# Altium PCB GTU-V1.0-20160325 .PcbDoc (part 3 of 5)
Units mil, origin at the board's own origin, x right, y up, seen from the top; angles counter-clockwise.
Board outline 6299.21 x 4330.71 mil, 4 copper layers (Top Layer, POWER, GND, Bottom Layer); 208 components, 165 nets, 695 pads, 348 vias.
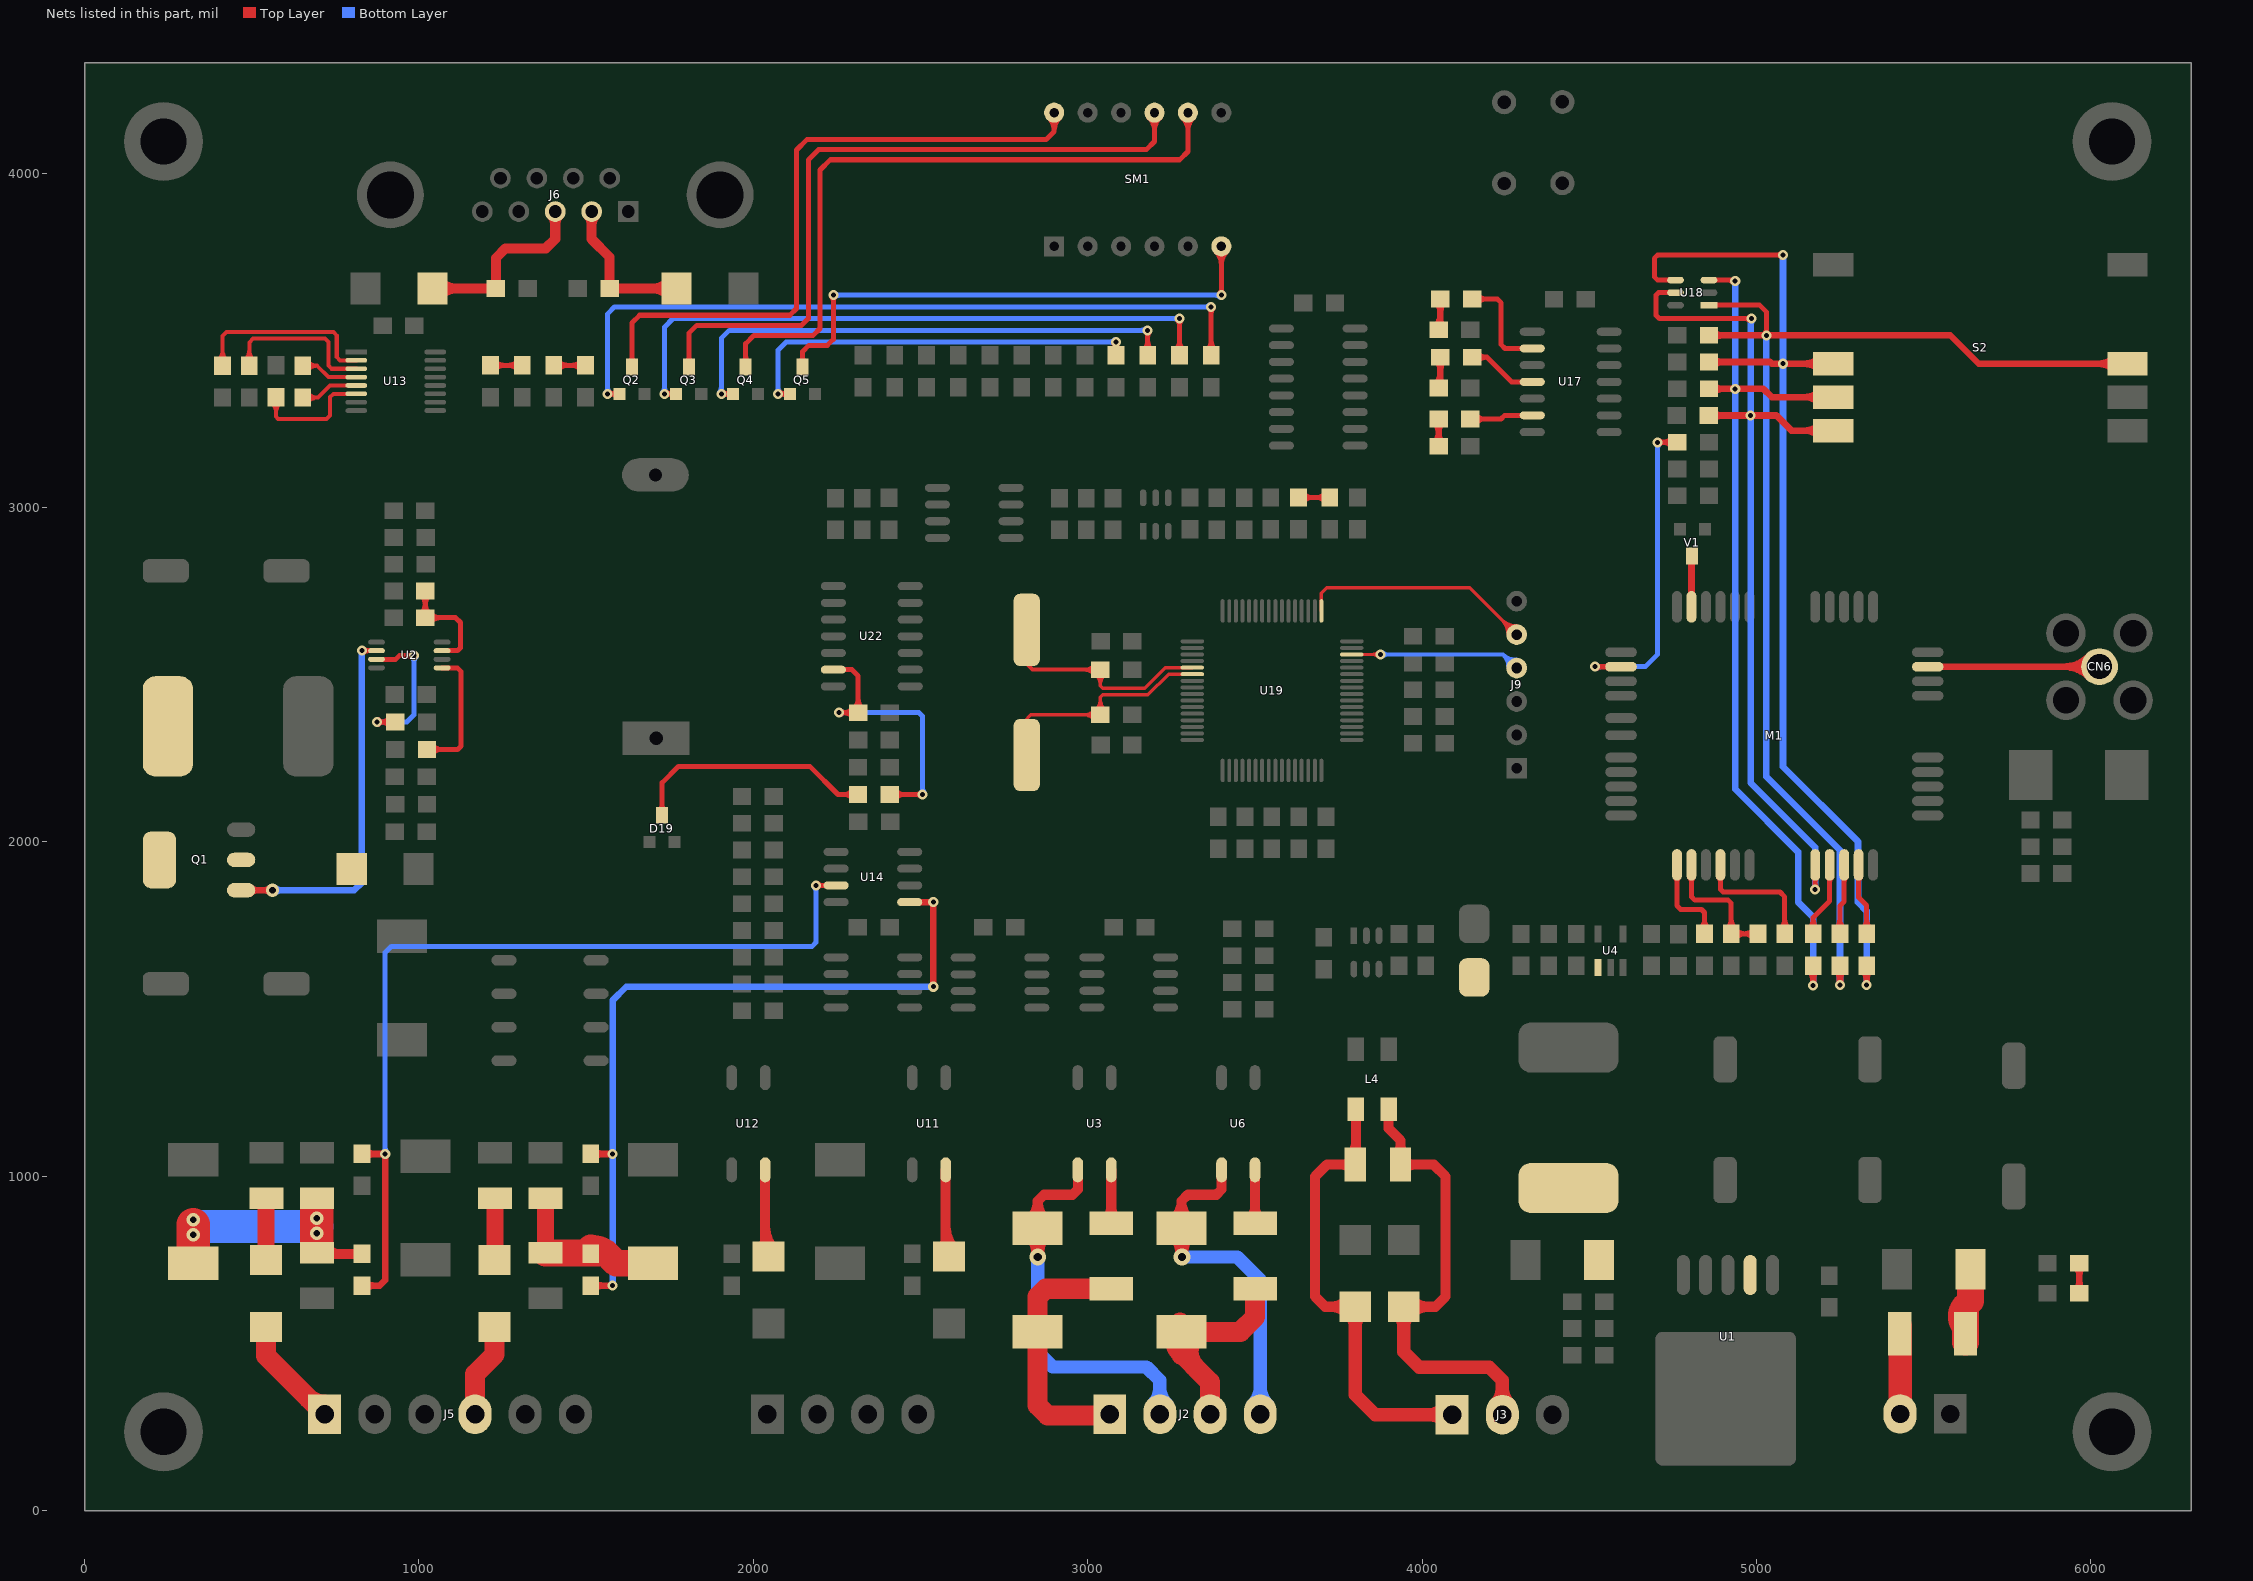
[diagram p5: the nets of this part, all layers, seen from the top]

## Via types
v1: diameter 30, hole 15, Top Layer to Bottom Layer, 262 vias
v2: diameter 40, hole 20, Top Layer to Bottom Layer, 36 vias
v3: diameter 40, hole 40, Top Layer to Bottom Layer, 16 vias
v4: diameter 80, hole 40, Top Layer to Bottom Layer, 12 vias
v5: diameter 60, hole 30, Top Layer to Bottom Layer, 11 vias
v6: diameter 50, hole 25, Top Layer to Bottom Layer, 10 vias
v7: diameter 70, hole 35, Top Layer to Bottom Layer, 1 vias

## Nets (pads, with @x,y where several pads share a name; then routed paths per layer and width w, separated by ;. In a path a pad name is that pad's centre, name@x,y a point inside that pad or via, vN(x,y) a via of type N, cw(c..) or ccw(c..) an arc to the next point about the centre after c; other vN are vias at no path point) (continued)
NetC21_2: C21.2 U13.3 | length 616.7
  Top Layer w12: C21.2@492.71,3424 492.71,3493.5 504.21,3505 719.21,3505 729.21,3495 729.21,3425 739.21,3415 U13.3@812.71,3415 ; 492.71,3472.37 cw(c446.84,3472.37) 479.28,3439.94 ccw(c446.84,3472.37) 492.71,3472.37 ; 492.71,3472.37 ccw(c538.58,3472.37) 506.15,3439.94 cw(c538.58,3472.37) 492.71,3472.37
NetC22_2: C22.2 U13.2 | length 711.7
  Top Layer w12: C22.2@412.71,3424 412.71,3513.5 424.21,3525 744.21,3525 754.21,3515 754.21,3450 764.21,3440 U13.2@812.71,3440 ; 412.71,3472.37 cw(c366.84,3472.37) 399.28,3439.94 ccw(c366.84,3472.37) 412.71,3472.37 ; 412.71,3472.37 ccw(c458.58,3472.37) 426.15,3439.94 cw(c458.58,3472.37) 412.71,3472.37
NetC23_2: C23.2 U13.6 | length 508.6
  Top Layer w12: C23.2@572.71,3330 572.71,3271.5 579.21,3265 724.21,3265 734.21,3275 734.21,3330 744.21,3340 U13.6@812.71,3340 ; 572.71,3281.63 cw(c618.58,3281.63) 586.15,3314.06 ccw(c618.58,3281.63) 572.71,3281.63 ; 572.71,3281.63 ccw(c526.84,3281.63) 559.28,3314.06 cw(c526.84,3281.63) 572.71,3281.63
NetC24_1: C24.1 U13.5 | length 317.2
  Top Layer w12: C24.1@652.71,3329 698.21,3329 ; U13.5@812.71,3365 734.21,3365 698.21,3329 ; 698.21,3329 cw(c698.21,3373.98) 666.23,3342.36 ccw(c698.21,3373.98) 698.21,3329 ; 698.21,3329 ccw(c698.21,3284.02) 666.23,3315.64 cw(c698.21,3284.02) 698.21,3329
NetC24_2: C24.2 U13.4 | length 302
  Top Layer w12: C24.2@652.71,3424 695.21,3424 ; U13.4@812.71,3390 729.21,3390 695.21,3424 ; 695.21,3424 cw(c695.21,3462.03) 666.87,3436.67 ccw(c695.21,3462.03) 695.21,3424 ; 695.21,3424 ccw(c695.21,3385.97) 666.87,3411.33 cw(c695.21,3385.97) 695.21,3424
NetC25_1: C25.1 R29.1 U14.3 | length 3054.6
  Top Layer w15: v1(2187,1870) U14.3@2247.6,1870 ; 2205.11,1870 cw(c2205.11,1888.11) 2192.3,1875.3 ccw(c2205.11,1888.11) 2205.11,1870 ; 2205.11,1870 ccw(c2205.11,1851.89) 2192.3,1864.7 cw(c2205.11,1851.89) 2205.11,1870
  Top Layer w20: R29.1@830,673 882.21,673 899.21,690 v1(899.21,1067) C25.1@830,1067 ; 866.21,673 cw(c866.21,709.21) 840.61,683.61 ccw(c866.21,709.21) 866.21,673 ; 866.21,673 ccw(c866.21,636.79) 840.61,662.39 cw(c866.21,636.79) 866.21,673 ; 866.21,1067 cw(c866.21,1103.21) 840.61,1077.61 ccw(c866.21,1103.21) 866.21,1067 ; 866.21,1067 ccw(c866.21,1030.79) 840.61,1056.39 cw(c866.21,1030.79) 866.21,1067
  Bottom Layer w15: v1(899.21,1067) 899.21,1669.21 918,1688 2176,1688 2187,1699 v1(2187,1870) ; 899.21,1085.11 cw(c881.11,1085.11) 893.91,1072.3 ccw(c881.11,1085.11) 899.21,1085.11 ; 899.21,1085.11 ccw(c917.32,1085.11) 904.52,1072.3 cw(c917.32,1085.11) 899.21,1085.11 ; 2187,1851.89 cw(c2205.11,1851.89) 2192.3,1864.7 ccw(c2205.11,1851.89) 2187,1851.89 ; 2187,1851.89 ccw(c2168.89,1851.89) 2181.7,1864.7 cw(c2168.89,1851.89) 2187,1851.89
NetC27_1: C27.1 R38.1 U14.5 | length 2510.3
  Top Layer w20: R38.1@1513.6,673 v1(1578.21,673) ; C27.1@1513.6,1067 v1(1578.21,1067) ; U14.5@2467.6,1820 v1(2538,1820) v1(2538,1567) ; 1549.81,673 cw(c1549.81,709.21) 1524.21,683.61 ccw(c1549.81,709.21) 1549.81,673 ; 1549.81,673 ccw(c1549.81,636.79) 1524.21,662.39 cw(c1549.81,636.79) 1549.81,673 ; 1549.81,1067 cw(c1549.81,1103.21) 1524.21,1077.61 ccw(c1549.81,1103.21) 1549.81,1067 ; 1549.81,1067 ccw(c1549.81,1030.79) 1524.21,1056.39 cw(c1549.81,1030.79) 1549.81,1067
  Bottom Layer w20: v1@1579.21,671.79 1579.21,1526.21 1620,1567 v1(2538,1567)
NetC34_2: C34.2 M1.27 S2.1 U18.5 | length 3167.9
  Top Layer w15: U18.5@4757.6,3642.5 4706.71,3642.5 4699.21,3635 4699.21,3575 4709.21,3565 v1(4984.21,3565) ; v1(5175.37,1857.16) M1.27@5175.37,1931.35 ; 4966.11,3565 cw(c4966.11,3546.89) 4978.91,3559.7 ccw(c4966.11,3546.89) 4966.11,3565 ; 4966.11,3565 ccw(c4966.11,3583.11) 4978.91,3570.3 cw(c4966.11,3583.11) 4966.11,3565 ; 5175.37,1875.26 cw(c5157.26,1875.26) 5170.07,1862.46 ccw(c5157.26,1875.26) 5175.37,1875.26 ; 5175.37,1875.26 ccw(c5193.48,1875.26) 5180.67,1862.46 cw(c5193.48,1875.26) 5175.37,1875.26 ; 5175.37,1881.33 cw(c5192.91,1881.33) 5180.51,1893.73 ccw(c5192.91,1881.33) 5175.37,1881.33 ; 5175.37,1881.33 ccw(c5157.83,1881.33) 5170.23,1893.73 cw(c5157.83,1881.33) 5175.37,1881.33
  Top Layer w20: C34.2@4856.6,3275 5059.21,3275 5104.21,3230 S2.1@5229.29,3230 ; 4895.31,3275 cw(c4895.31,3311.21) 4869.71,3285.61 ccw(c4895.31,3311.21) 4895.31,3275 ; 4895.31,3275 ccw(c4895.31,3238.79) 4869.71,3264.39 cw(c4895.31,3238.79) 4895.31,3275 ; 5143.94,3230 cw(c5143.94,3169.64) 5186.61,3212.32 ccw(c5143.94,3169.64) 5143.94,3230 ; 5143.94,3230 ccw(c5143.94,3290.36) 5186.61,3247.68 cw(c5143.94,3290.36) 5143.94,3230
  Bottom Layer w20: v1@4982.21,3567 4982.21,2177 5175.37,1983.84 v1(5175.37,1857.16) ; 4982.21,3548.1 cw(c5001.11,3548.1) 4987.75,3561.46 ccw(c5001.11,3548.1) 4982.21,3548.1
  other v1: 4982.21,3275
NetC35_1: C35.1 R42.2 S2.3 U18.4 | length 3711.1
  Top Layer w15: U18.4@4757.6,3680 4704.21,3680 4694.21,3690 4694.21,3745 4704.21,3755 v1(5079.21,3755) ; 5061.11,3755 cw(c5061.11,3736.89) 5073.91,3749.7 ccw(c5061.11,3736.89) 5061.11,3755 ; 5061.11,3755 ccw(c5061.11,3773.11) 5073.91,3760.3 cw(c5061.11,3773.11) 5061.11,3755
  Top Layer w20: C35.1@4857.6,3435 5040.21,3435 5045.21,3430 S2.3@5229.29,3430 S2.3@5224.29,3435 ; v1(5329.21,1572) R42.2@5329.21,1630 ; 4896.31,3435 cw(c4896.31,3471.21) 4870.71,3445.61 ccw(c4896.31,3471.21) 4896.31,3435 ; 4896.31,3435 ccw(c4896.31,3398.79) 4870.71,3424.39 cw(c4896.31,3398.79) 4896.31,3435 ; 5143.94,3430 cw(c5143.94,3369.64) 5186.61,3412.32 ccw(c5143.94,3369.64) 5143.94,3430 ; 5143.94,3430 ccw(c5143.94,3490.36) 5186.61,3447.68 cw(c5143.94,3490.36) 5143.94,3430 ; 5329.21,1591.29 cw(c5365.43,1591.29) 5339.82,1616.89 ccw(c5365.43,1591.29) 5329.21,1591.29 ; 5329.21,1591.29 ccw(c5293,1591.29) 5318.61,1616.89 cw(c5293,1591.29) 5329.21,1591.29
  Bottom Layer w20: v1(5079.21,3755) 5079.21,2225 5303.21,2001 5303.21,1820 5329.21,1794 v1(5329.21,1572)
  other v1: 5079.21,3430
NetC36_1: C36.1 R45.2 S2.6 U18.1 | length 4102.9
  Top Layer w15: U18.1@4857.6,3605 5009.21,3605 5029.21,3585 v1(5029.21,3515) ; 5029.21,3533.11 cw(c5011.11,3533.11) 5023.91,3520.3 ccw(c5011.11,3533.11) 5029.21,3533.11 ; 5029.21,3533.11 ccw(c5047.32,3533.11) 5034.52,3520.3 cw(c5047.32,3533.11) 5029.21,3533.11
  Top Layer w20: C36.1@4857.6,3515 5579.21,3515 5664.21,3430 S2.6@6109.21,3430 ; v1(5249.21,1572) R45.2@5249.21,1630 ; 4896.31,3515 cw(c4896.31,3551.21) 4870.71,3525.61 ccw(c4896.31,3551.21) 4896.31,3515 ; 4896.31,3515 ccw(c4896.31,3478.79) 4870.71,3504.39 cw(c4896.31,3478.79) 4896.31,3515 ; 5249.21,1591.29 cw(c5285.43,1591.29) 5259.82,1616.89 ccw(c5285.43,1591.29) 5249.21,1591.29 ; 5249.21,1591.29 ccw(c5213,1591.29) 5238.61,1616.89 cw(c5213,1591.29) 5249.21,1591.29 ; 6023.86,3430 cw(c6023.86,3369.64) 6066.53,3412.32 ccw(c6023.86,3369.64) 6023.86,3430 ; 6023.86,3430 ccw(c6023.86,3490.36) 6066.53,3447.68 cw(c6023.86,3490.36) 6023.86,3430
  Bottom Layer w20: v1(5029.21,3515) 5029.21,2195 5249.21,1975 v1(5249.21,1572)
NetC37_1: C37.1 R48.2 S2.2 U18.3 | length 3179.5
  Top Layer w15: U18.3@4857.6,3680 v1@4936.21,3680 ; 4913.28,3680 cw(c4913.28,3655.07) 4930.91,3672.7 ccw(c4913.28,3655.07) 4913.28,3680
  Top Layer w20: C37.1@4857.6,3355 5020.21,3355 5045.21,3330 S2.2@5229.29,3330 ; v1(5169.21,1571) R48.2@5169.21,1630 ; 4896.31,3355 cw(c4896.31,3391.21) 4870.71,3365.61 ccw(c4896.31,3391.21) 4896.31,3355 ; 4896.31,3355 ccw(c4896.31,3318.79) 4870.71,3344.39 cw(c4896.31,3318.79) 4896.31,3355 ; 5143.94,3330 cw(c5143.94,3269.64) 5186.61,3312.32 ccw(c5143.94,3269.64) 5143.94,3330 ; 5143.94,3330 ccw(c5143.94,3390.36) 5186.61,3347.68 cw(c5143.94,3390.36) 5143.94,3330 ; 5169.21,1591.29 cw(c5205.43,1591.29) 5179.82,1616.89 ccw(c5205.43,1591.29) 5169.21,1591.29 ; 5169.21,1591.29 ccw(c5133,1591.29) 5158.61,1616.89 cw(c5133,1591.29) 5169.21,1591.29
  Bottom Layer w20: v1(4936.21,3678) 4936.21,2158 5124.21,1970 5124.21,1820 5169.21,1775 v1(5169.21,1571)
  other v1: 4936.21,3355
NetC47_1: C47.1 U19.5 Y1.2 | length 943.4
  Top Layer w10: C47.1@3037.6,2520 3037.6,2467.4 ; U19.5@3312.6,2521.26 3231.26,2521.26 3170,2460 3045,2460 3037.6,2467.4 ; 3037.6,2467.4 cw(c3084.23,2467.4) 3051.6,2500.71 ccw(c3084.23,2467.4) 3037.6,2467.4 ; 3037.6,2467.4 ccw(c2990.97,2467.4) 3023.6,2500.71 cw(c2990.97,2467.4) 3037.6,2467.4
  Top Layer w12: Y1.2@2817.6,2540 2817.6,2570 2820,2567.6 2820,2530 2835,2515 C47.1@3037.6,2515 ; 2989.23,2515 cw(c2989.23,2469.13) 3021.66,2501.56 ccw(c2989.23,2469.13) 2989.23,2515 ; 2989.23,2515 ccw(c2989.23,2560.87) 3021.66,2528.44 cw(c2989.23,2560.87) 2989.23,2515
NetC48_1: C48.1 U19.6 Y1.1 | length 1032.7
  Top Layer w10: Y1.1@2817.6,2330 2810,2337.6 Y1.1@2810,2360 ; Y1.1@2820,2340 2810,2350 Y1.1@2810,2360 ; C48.1@3037.6,2370 3037.6,2432.6 3045,2440 3180,2440 3241.57,2501.57 U19.6@3312.6,2501.57 ; C48.1@3037.6,2380 2830,2380 Y1.1@2810,2360 ; 2986.81,2380 cw(c2986.81,2331.72) 3020.96,2365.86 ccw(c2986.81,2331.72) 2986.81,2380 ; 2986.81,2380 ccw(c2986.81,2428.28) 3020.96,2394.14 cw(c2986.81,2428.28) 2986.81,2380 ; 3037.6,2428.28 cw(c2989.31,2428.28) 3023.46,2394.14 ccw(c2989.31,2428.28) 3037.6,2428.28 ; 3037.6,2428.28 ccw(c3085.88,2428.28) 3051.74,2394.14 cw(c3085.88,2428.28) 3037.6,2428.28
  Top Layer w30: Y1.1@2817.6,2260 Y1.1@2817.6,2330
NetC49_1: C49.1 R77.1 U22.6 | length 1461.6
  Top Layer w15: U22.6@2239.21,2515 2295,2515 2313.21,2496.79 C49.1@2313.21,2386.67 v1@2256,2386.67 ; R77.1@2408,2142 2506,2142 v1(2506.33,2141.67) ; v1@2268.46,2386.67 cw(c2268.46,2344.42) 2298.34,2374.29 ccw(c2268.46,2344.42) v1@2268.46,2386.67 ; v1@2268.46,2386.67 ccw(c2268.46,2428.92) 2298.34,2399.04 cw(c2268.46,2428.92) v1@2268.46,2386.67 ; 2313.21,2428.92 cw(c2270.96,2428.92) 2300.84,2399.04 ccw(c2270.96,2428.92) 2313.21,2428.92 ; 2313.21,2428.92 ccw(c2355.46,2428.92) 2325.59,2399.04 cw(c2355.46,2428.92) 2313.21,2428.92 ; 2452.75,2142 cw(c2452.75,2184.25) 2422.87,2154.37 ccw(c2452.75,2184.25) 2452.75,2142 ; 2452.75,2142 ccw(c2452.75,2099.75) 2422.87,2129.63 cw(c2452.75,2099.75) 2452.75,2142 ; v1@2261.3,2381.7 cw(c2273.3,2369.7) 2273.3,2386.67 ccw(c2273.3,2369.7) v1@2261.3,2381.7 ; v1@2261.3,2392.3 ccw(c2274.91,2405.91) 2274.91,2386.67 cw(c2274.91,2405.91) v1@2261.3,2392.3 ; 2487.42,2142 cw(c2487.42,2122.76) 2501.03,2136.36 ccw(c2487.42,2122.76) 2487.42,2142 ; 2489.03,2142 ccw(c2489.03,2158.97) 2501.03,2146.97 cw(c2489.03,2158.97) 2489.03,2142
  Bottom Layer w15: v1(2256,2387) 2495,2387 2506,2376 v1@2506,2142 ; 2274.11,2387 cw(c2274.11,2405.11) 2261.3,2392.3 ccw(c2274.11,2405.11) 2274.11,2387 ; 2274.11,2387 ccw(c2274.11,2368.89) 2261.3,2381.7 cw(c2274.11,2368.89) 2274.11,2387 ; v1@2501.03,2146.97 ccw(c2489.03,2158.97) 2506,2158.97 cw(c2489.03,2158.97) v1@2501.03,2146.97 ; 2506,2160.58 ccw(c2525.24,2160.58) 2511.64,2146.97 cw(c2525.24,2160.58) 2506,2160.58
NetCN6_1: CN6.1 M1.39 | length 1044.5
  Top Layer w20: M1.39@5511.98,2524 CN6.1@6025.6,2524 ; 5916.96,2524 cw(c5916.96,2415.36) 5993.78,2492.18 ccw(c5916.96,2415.36) 5916.96,2524 ; 5916.96,2524 ccw(c5916.96,2632.64) 5993.78,2555.82 cw(c5916.96,2632.64) 5916.96,2524 ; 5965.24,2524 cw(c5965.24,2463.64) 6007.92,2506.32 ccw(c5965.24,2463.64) 5965.24,2524 ; 5965.24,2524 ccw(c5965.24,2584.36) 6007.92,2541.68 cw(c5965.24,2584.36) 5965.24,2524
NetD1_A: D1.A PTC1.2 | length 498.6
  Top Layer w80: PTC1.2@5624.66,504 5624.66,612.45 ; D1.A@5639.6,722 5639.6,627.39 ; 5624.66,612.45 ccw(c5655.19,581.92) 5620.66,556 cw(c5655.19,581.92) 5624.66,612.45 ; 5624.66,612.45 5639.6,627.39 ; 5639.6,627.38 ccw(c5692.15,574.83) 5619.79,557.86 cw(c5692.15,574.83) 5639.6,627.38
NetD2_K: D2.K L1.1 U1.2
NetD3_A: D3.A L2.1 Q1.2 Q1.4
NetD5_A: D5.A J2.2 U3.4 | length 1855
  Top Layer w30: D5.A@2850.21,845 2850.21,926 ; U3.4@2970.21,1019.41 2970.21,961 2954.21,945 2869.21,945 2850.21,926 ; 2850.21,926 cw(c2773.99,926) 2826.23,870.49 ccw(c2773.99,926) 2850.21,926 ; 2850.21,926 ccw(c2926.43,926) 2874.2,870.49 cw(c2926.43,926) 2850.21,926
  Top Layer w40: v6(2850.21,758.79) D5.A@2850.21,845 ; v6@2850.21,772.57 cw(c2922.64,772.57) 2871.43,823.79 ccw(c2922.64,772.57) v6@2850.21,772.57 ; v6@2850.21,772.57 ccw(c2777.79,772.57) 2829,823.79 cw(c2777.79,772.57) v6@2850.21,772.57
  Bottom Layer w40: v6(2850.21,758.79) 2850.21,474.79 2895,430 3175.76,430 3215.76,390 3215.76,285.76 J2.2@3210,280 ; 3215.76,368.75 cw(c3145.24,368.75) 3195.11,318.88 ccw(c3145.24,368.75) 3215.76,368.75 ; 3215.76,368.75 ccw(c3286.29,368.75) 3236.42,318.88 cw(c3286.29,368.75) 3215.76,368.75
NetD5_K: D5.K J2.1 PTC2.2 | length 875.6
  Top Layer w60: J2.1@3065.76,288.39 3062.38,285 2880,285 2850.21,314.79 2850.21,640.21 2873.94,663.94 PTC2.2@3070.21,663.94 ; 3011.21,285 ccw(c3011.21,342.94) 3052.18,301.97 cw(c3011.21,342.94) 3011.21,285
NetD6_A: D6.A J2.4 U6.4 | length 1684.2
  Top Layer w30: D6.A@3280.21,845 3280.21,926 ; U6.4@3400.21,1019.41 3400.21,961 3384.21,945 3299.21,945 3280.21,926 ; 3280.21,926 cw(c3203.99,926) 3256.23,870.49 ccw(c3203.99,926) 3280.21,926 ; 3280.21,926 ccw(c3356.43,926) 3304.2,870.49 cw(c3356.43,926) 3280.21,926
  Top Layer w40: v6(3282,758.79) D6.A@3282,845 ; D6.A@3259,823.79 cw(c3203.47,768.26) 3282,768.26 ccw(c3203.47,768.26) D6.A@3259,823.79 ; v6@3282,776.89 cw(c3348.32,776.89) 3301.43,823.79 ccw(c3348.32,776.89) v6@3282,776.89
  Bottom Layer w40: v6@3280.21,758.79 3446.98,758.79 3515.76,690 J2.4@3515.76,327.76 ; 3515.76,368.75 cw(c3445.24,368.75) 3495.11,318.88 ccw(c3445.24,368.75) 3515.76,368.75 ; 3515.76,368.75 ccw(c3586.29,368.75) 3536.42,318.88 cw(c3586.29,368.75) 3515.76,368.75
NetD6_K: D6.K J2.3 PTC3.2 | length 1097.1
  Top Layer w60: J2.3@3365.76,327.76 3365.76,384.45 3280.21,470 D6.K@3280.21,535 3456.21,535 3500.21,579 PTC3.2@3500.21,663.94 ; D6.K@3276.27,562.61 ccw(c3322.73,518.29) 3277.33,472.89 cw(c3322.73,518.29) D6.K@3276.27,562.61 ; 3280.21,465.36 cw(c3336.6,465.36) 3313.43,516.77 ccw(c3336.6,465.36) 3280.21,465.36 ; D6.K@3319.68,521.19 ccw(c3367.19,475.87) 3320.76,429.45 cw(c3367.19,475.87) D6.K@3319.68,521.19
NetD9_K: D9.K J3.1 L4.3 R19.1 | length 1992.4
  Top Layer w30: D9.K@3776.29,588.79 ccw(c3725.07,537.57) 3725.07,610 ccw(c3725.07,682.43) D9.K@3776.29,631.21 ; R19.1@3788.19,1022.98 ccw(c3759.17,993.96) 3759.17,1035 ccw(c3759.17,1076.04) R19.1@3788.19,1047.02 ; D9.K@3800,610 3710,610 3680,640 3680,1000 3715,1035 R19.1@3800.21,1035 ; R19.1@3801.57,1036.36 L4.3@3801.57,1200.87 ; R19.1@3788.19,1066.02 ccw(c3755.88,1098.33) 3801.57,1098.33 cw(c3755.88,1098.33) R19.1@3788.19,1066.02 ; 3801.57,1091.75 ccw(c3837.97,1091.75) 3812.23,1066.02 cw(c3837.97,1091.75) 3801.57,1091.75
  Top Layer w40: D9.K@3782.32,592.32 cw(c3739.64,549.64) 3800,549.64 cw(c3860.36,549.64) D9.K@3817.68,592.32 ; D9.K@3800,610 3800,347.4 3860,287.4 J3.1@4089.76,287.4 ; 4019.24,287.4 cw(c4019.24,216.88) 4069.11,266.75 ccw(c4019.24,216.88) 4019.24,287.4 ; 4019.24,287.4 ccw(c4019.24,357.93) 4069.11,308.06 cw(c4019.24,357.93) 4019.24,287.4
NetD10_K: D10.K J3.2 L4.4 R19.2 | length 2018.4
  Top Layer w30: L4.4@3900,1200.87 3900,1143 3935.21,1107.79 R19.2@3935.21,1035 4035,1035 4070,1000 4070,640 4040,610 D10.K@3945,610 ; R19.2@3947.23,1022.98 cw(c3976.25,993.96) 3976.25,1035 cw(c3976.25,1076.04) R19.2@3947.23,1047.02 ; D10.K@3968.71,588.79 cw(c4019.93,537.57) 4019.93,610 cw(c4019.93,682.43) D10.K@3968.71,631.21 ; 3935.21,1095.04 cw(c3894.17,1095.04) 3923.19,1066.02 ccw(c3894.17,1095.04) 3935.21,1095.04 ; 3935.21,1095.04 ccw(c3976.25,1095.04) 3947.23,1066.02 cw(c3976.25,1095.04) 3935.21,1095.04
  Top Layer w40: D10.K@3927.32,592.32 cw(c3884.64,549.64) 3945,549.64 cw(c4005.36,549.64) D10.K@3962.68,592.32 ; D10.K@3945,610 3945,475 3991.15,428.85 4201.15,428.85 4239.76,390.24 J3.2@4239.76,287.4 ; 4239.76,367.77 cw(c4169.24,367.77) 4219.11,317.9 ccw(c4169.24,367.77) 4239.76,367.77 ; 4239.76,367.77 ccw(c4310.29,367.77) 4260.42,317.9 cw(c4310.29,367.77) 4239.76,367.77
NetD11_A: D11.A U11.3 | length 501.1
  Top Layer w30: U11.3@2575.21,1019.41 2575.21,760 D11.A@2585.21,750 ; D11.A@2561.5,781.21 ccw(c2528.39,814.32) 2575.21,814.32 cw(c2528.39,814.32) D11.A@2561.5,781.21 ; 2575.21,850.53 ccw(c2673.25,850.53) 2603.93,781.21 cw(c2673.25,850.53) 2575.21,850.53
NetD12_A: D12.A U12.3 | length 501.1
  Top Layer w30: U12.3@2035.21,1019.41 2035.21,760 D12.A@2045.21,750 ; D12.A@2021.5,781.21 ccw(c1988.39,814.32) 2035.21,814.32 cw(c1988.39,814.32) D12.A@2021.5,781.21 ; 2035.21,850.53 ccw(c2133.25,850.53) 2063.93,781.21 cw(c2133.25,850.53) 2035.21,850.53
NetD13_K: D13.K R26.1 R29.2 R32.2 | length 857
  Top Layer w30: R26.1@694.8,771 697.8,768 R29.2@830,768 ; R26.1@725.82,758.98 cw(c747.6,737.2) 747.6,768 ccw(c747.6,737.2) R26.1@725.82,758.98 ; R26.1@725.82,783.02 ccw(c762.08,819.28) 762.08,768 cw(c762.08,819.28) R26.1@725.82,783.02
  Top Layer w100: D13.K@325.21,740 v2@325.21,856 ; R26.1@694.8,800 R32.2@694.8,910
  Bottom Layer w100: 329.21,850 694.8,850
  other v2: 325.21,825 694.8,830 325,870 694.8,875
NetD14_K: D14.K J6.3 R36.1 | length 912.7
  Top Layer w30: D14.K@1040.21,3655 R36.1@1230.21,3655 1230.21,3746 1259.21,3775 1379.21,3775 1407.6,3803.39 J6.3@1407.6,3885 ; 1112.64,3655 cw(c1112.64,3727.43) 1061.43,3676.21 ccw(c1112.64,3727.43) 1112.64,3655 ; 1112.64,3655 ccw(c1112.64,3582.57) 1061.43,3633.79 cw(c1112.64,3582.57) 1112.64,3655 ; 1407.6,3846.37 cw(c1446.23,3846.37) 1418.91,3873.69 ccw(c1446.23,3846.37) 1407.6,3846.37 ; 1407.6,3846.37 ccw(c1368.97,3846.37) 1396.28,3873.69 cw(c1368.97,3846.37) 1407.6,3846.37
NetD15_K: D15.K J6.2 R35.1 | length 801.1
  Top Layer w30: J6.2@1516.6,3885 1516.6,3802.61 1570.21,3749 R35.1@1570.21,3655 D15.K@1770.21,3655 ; 1516.6,3846.37 cw(c1555.23,3846.37) 1527.91,3873.69 ccw(c1555.23,3846.37) 1516.6,3846.37 ; 1516.6,3846.37 ccw(c1477.97,3846.37) 1505.28,3873.69 cw(c1477.97,3846.37) 1516.6,3846.37 ; 1697.79,3655 cw(c1697.79,3582.57) 1749,3633.79 ccw(c1697.79,3582.57) 1697.79,3655 ; 1697.79,3655 ccw(c1697.79,3727.43) 1749,3676.21 cw(c1697.79,3727.43) 1697.79,3655
NetD16_A: D16.A R33.2 | length 335.7
  Top Layer w50: D16.A@542.6,750 R33.2@542.6,934 ; 542.6,798.28 cw(c494.31,798.28) 528.46,764.14 ccw(c494.31,798.28) 542.6,798.28 ; 542.6,798.28 ccw(c590.88,798.28) 556.74,764.14 cw(c590.88,798.28) 542.6,798.28
NetD16_K: D16.K J5.1 | length 444.4
  Top Layer w60: D16.K@542.6,550 542.6,463.55 J5.1@717.76,288.39 ; 668.16,337.99 ccw(c717.76,387.59) 717.76,317.44 cw(c717.76,387.59) 668.16,337.99
NetD17_A: D17.A R34.2 | length 335.7
  Top Layer w50: D17.A@1227.2,751 R34.2@1227.2,935 ; D17.A@1212.06,764.14 ccw(c1175.5,800.7) 1227.2,800.7 cw(c1175.5,800.7) D17.A@1212.06,764.14 ; 1227.2,795.87 ccw(c1272.07,795.87) 1240.34,764.14 cw(c1272.07,795.87) 1227.2,795.87
NetD17_K: D17.K J5.4 | length 246.4
  Top Layer w60: J5.4@1167.76,327.76 1167.76,408.55 1226.2,466.99 D17.K@1226.2,550
NetD18_K: D18.K R37.1 R38.2 R40.2 | length 756.2
  Top Layer w30: R37.1@1378.4,771 R37.1@1381.4,768
  Top Layer w50: R37.1@1378.4,771 R40.2@1378.4,935
  Top Layer w80: R37.1@1378.4,771 1559,771 1590,740 D18.K@1700.21,740 ; R38.2@1513.6,780.5 cw(c1513.6,693.83) 1574.89,755.11 ccw(c1513.6,693.83) R38.2@1513.6,780.5 ; R38.2@1513.6,785.5 cw(c1513.6,710.9) 1566.35,763.65 ccw(c1513.6,710.9) R38.2@1513.6,785.5
NetD19_3: D19.3 R77.2 | length 950.4
  Top Layer w15: D19.3@1727.21,2080 1727.21,2177.21 1776,2226 2169,2226 2253,2142 R77.2@2313,2142 ; 1727.21,2112.35 cw(c1701.86,2112.35) 1719.79,2094.42 ccw(c1701.86,2112.35) 1727.21,2112.35 ; 1727.21,2112.35 ccw(c1752.56,2112.35) 1734.64,2094.42 cw(c1752.56,2112.35) 1727.21,2112.35 ; 2268.25,2142 cw(c2268.25,2099.75) 2298.13,2129.63 ccw(c2268.25,2099.75) 2268.25,2142 ; 2268.25,2142 ccw(c2268.25,2184.25) 2298.13,2154.37 cw(c2268.25,2184.25) 2268.25,2142
NetJ1_2: J1.2 PTC1.1 | length 224.2
  Top Layer w70: J1.2@5429.05,328.76 PTC1.1@5429.05,553
NetJ9_4: J9.4 U19.46 | length 829.7
  Top Layer w10: U19.46@3789.61,2560.63 v1(3875.37,2560.63) ; 3851.23,2560.63 cw(c3851.23,2536.49) 3868.3,2553.56 ccw(c3851.23,2536.49) 3851.23,2560.63 ; 3851.23,2560.63 ccw(c3851.23,2584.77) 3868.3,2567.7 cw(c3851.23,2584.77) 3851.23,2560.63
  Bottom Layer w12: v1(3875.37,2560.63) 4241.97,2560.63 ; J9.4@4282.6,2520 4241.97,2560.63 ; 3897.1,2560.63 cw(c3897.1,2582.36) 3881.73,2566.99 ccw(c3897.1,2582.36) 3897.1,2560.63 ; 3897.1,2560.63 ccw(c3897.1,2538.9) 3881.73,2554.27 cw(c3897.1,2538.9) 3897.1,2560.63 ; 4241.97,2560.63 cw(c4204.12,2522.78) 4257.61,2520.89 ccw(c4204.12,2522.78) 4241.97,2560.63 ; 4241.97,2560.63 ccw(c4279.82,2598.48) 4281.71,2544.98 cw(c4279.82,2598.48) 4241.97,2560.63
NetJ9_5: J9.5 U19.49 | length 1020
  Top Layer w10: U19.49@3698.74,2690.87 3698.74,2743.74 3715,2760 4142.6,2760 J9.5@4282.6,2620 ; 4238.21,2664.38 cw(c4193.83,2620) 4256.6,2620 ccw(c4193.83,2620) 4238.21,2664.38 ; 4238.21,2664.38 ccw(c4282.6,2708.77) 4282.6,2646 cw(c4282.6,2708.77) 4238.21,2664.38 ; 4255.28,2647.31 cw(c4227.97,2620) 4266.6,2620 ccw(c4227.97,2620) 4255.28,2647.31 ; 4255.28,2647.31 ccw(c4282.6,2674.63) 4282.6,2636 cw(c4282.6,2674.63) 4255.28,2647.31
NetL3_1: L3.1 U4.3
NetLED1_1: LED1.1 R2.2 | length 317.5
  Top Layer w20: R2.2@5965,650 LED1.1@5965,740 ; 5965,686.21 cw(c5928.79,686.21) 5954.39,660.61 ccw(c5928.79,686.21) 5965,686.21 ; 5965,686.21 ccw(c6001.21,686.21) 5975.61,660.61 cw(c6001.21,686.21) 5965,686.21 ; 5965,703.79 cw(c6001.21,703.79) 5975.61,729.39 ccw(c6001.21,703.79) 5965,703.79 ; 5965,703.79 ccw(c5928.79,703.79) 5954.39,729.39 cw(c5928.79,703.79) 5965,703.79
NetLED2_1: LED2.1 R27.1 | length 360.3
  Top Layer w15: LED2.1@1403.38,3425 R27.1@1498.21,3425 ; 1445.63,3425 cw(c1445.63,3467.25) 1415.75,3437.37 ccw(c1445.63,3467.25) 1445.63,3425 ; 1445.63,3425 ccw(c1445.63,3382.75) 1415.75,3412.63 cw(c1445.63,3382.75) 1445.63,3425 ; 1455.96,3425 cw(c1455.96,3382.75) 1485.84,3412.63 ccw(c1455.96,3382.75) 1455.96,3425 ; 1455.96,3425 ccw(c1455.96,3467.25) 1485.84,3437.37 cw(c1455.96,3467.25) 1455.96,3425
NetLED3_1: LED3.1 R28.1 | length 360.3
  Top Layer w15: LED3.1@1213.71,3425 R28.1@1308.55,3425 ; 1255.96,3425 cw(c1255.96,3467.25) 1226.09,3437.37 ccw(c1255.96,3467.25) 1255.96,3425 ; 1255.96,3425 ccw(c1255.96,3382.75) 1226.09,3412.63 cw(c1255.96,3382.75) 1255.96,3425 ; 1266.3,3425 cw(c1266.3,3382.75) 1296.17,3412.63 ccw(c1266.3,3382.75) 1266.3,3425 ; 1266.3,3425 ccw(c1266.3,3467.25) 1296.17,3437.37 cw(c1266.3,3467.25) 1266.3,3425
NetLED4_1: LED4.1 U17.4 | length 341.6
  Top Layer w15: LED4.1@4149.21,3449.61 4193.6,3449.61 ; U17.4@4329.21,3375.61 4267.6,3375.61 4193.6,3449.61 ; 4193.6,3449.61 cw(c4193.6,3490.98) 4164.16,3461.91 ccw(c4193.6,3490.98) 4193.6,3449.61 ; 4193.6,3449.61 ccw(c4193.6,3408.24) 4164.16,3437.32 cw(c4193.6,3408.24) 4193.6,3449.61
NetLED4_2: LED4.2 R58.1 | length 321.6
  Top Layer w20: R58.1@4049.21,3357.61 4054.21,3362.61 LED4.2@4054.21,3449.61 ; 4054.21,3413.4 cw(c4090.43,3413.4) 4064.82,3439.01 ccw(c4090.43,3413.4) 4054.21,3413.4 ; 4054.21,3413.4 ccw(c4018,3413.4) 4043.61,3439.01 cw(c4018,3413.4) 4054.21,3413.4 ; R58.1@4041.11,3368.22 ccw(c4009.46,3399.86) 4054.21,3399.86 cw(c4009.46,3399.86) R58.1@4041.11,3368.22 ; 4054.21,3387.79 ccw(c4081.89,3387.79) 4062.32,3368.22 cw(c4081.89,3387.79) 4054.21,3387.79
NetLED5_1: LED5.1 U17.2 | length 447.3
  Top Layer w15: LED5.1@4149.21,3623.61 4224.6,3623.61 4236.21,3612 4236.21,3487 4247.6,3475.61 U17.2@4329.21,3475.61 ; 4193.96,3623.61 cw(c4193.96,3665.86) 4164.09,3635.99 ccw(c4193.96,3665.86) 4193.96,3623.61 ; 4193.96,3623.61 ccw(c4193.96,3581.37) 4164.09,3611.24 cw(c4193.96,3581.37) 4193.96,3623.61
NetLED5_2: LED5.2 R59.1 | length 321.6
  Top Layer w20: R59.1@4049.21,3531.61 4054.21,3536.61 LED5.2@4054.21,3623.61 ; 4054.21,3587.4 cw(c4090.43,3587.4) 4064.82,3613.01 ccw(c4090.43,3587.4) 4054.21,3587.4 ; 4054.21,3587.4 ccw(c4018,3587.4) 4043.61,3613.01 cw(c4018,3587.4) 4054.21,3587.4 ; R59.1@4041.11,3542.22 ccw(c4009.46,3573.86) 4054.21,3573.86 cw(c4009.46,3573.86) R59.1@4041.11,3542.22 ; 4054.21,3561.79 ccw(c4081.89,3561.79) 4062.32,3542.22 cw(c4081.89,3561.79) 4054.21,3561.79
NetLED6_1: LED6.1 R57.2 | length 308.5
  Top Layer w20: R57.2@4049.21,3183.61 LED6.1@4049.21,3264.61 ; 4049.21,3219.83 cw(c4013,3219.83) 4038.61,3194.22 ccw(c4013,3219.83) 4049.21,3219.83 ; 4049.21,3219.83 ccw(c4085.43,3219.83) 4059.82,3194.22 cw(c4085.43,3219.83) 4049.21,3219.83 ; 4049.21,3228.4 cw(c4085.43,3228.4) 4059.82,3254.01 ccw(c4085.43,3228.4) 4049.21,3228.4 ; 4049.21,3228.4 ccw(c4013,3228.4) 4038.61,3254.01 cw(c4013,3228.4) 4049.21,3228.4
NetLED6_2: LED6.2 U17.6 | length 322.3
  Top Layer w15: LED6.2@4144.21,3264.61 4235.83,3264.61 4246.83,3275.61 U17.6@4329.21,3275.61 ; 4188.96,3264.61 cw(c4188.96,3306.86) 4159.09,3276.99 ccw(c4188.96,3306.86) 4188.96,3264.61 ; 4188.96,3264.61 ccw(c4188.96,3222.37) 4159.09,3252.24 cw(c4188.96,3222.37) 4188.96,3264.61
NetLED7_1: LED7.1 R71.1 | length 359.2
  Top Layer w15: LED7.1@3630.1,3030 R71.1@3723.85,3030 ; 3672.35,3030 cw(c3672.35,3072.25) 3642.47,3042.37 ccw(c3672.35,3072.25) 3672.35,3030 ; 3672.35,3030 ccw(c3672.35,2987.75) 3642.47,3017.63 cw(c3672.35,2987.75) 3672.35,3030 ; 3681.6,3030 cw(c3681.6,2987.75) 3711.47,3017.63 ccw(c3681.6,2987.75) 3681.6,3030 ; 3681.6,3030 ccw(c3681.6,3072.25) 3711.47,3042.37 cw(c3681.6,3072.25) 3681.6,3030
NetM1_10: M1.10 V1.3 | length 195.7
  Top Layer w20: M1.10@4805.29,2703 4805.29,2852.69 V1.3@4807.6,2855 ; 4805.29,2823.12 cw(c4832.48,2823.12) 4813.26,2842.34 ccw(c4832.48,2823.12) 4805.29,2823.12
NetM1_13: M1.13 R56.1 | length 1389.5
  Top Layer w15: v1@4516.21,2523.87 M1.13@4594.66,2523.87 ; v1(4704.21,3195) R56.1@4762.6,3195 ; 4544.64,2523.87 cw(c4544.64,2506.33) 4557.04,2518.73 ccw(c4544.64,2506.33) 4544.64,2523.87 ; 4544.64,2523.87 ccw(c4544.64,2541.4) 4557.04,2529 cw(c4544.64,2541.4) 4544.64,2523.87 ; v1@4717.85,3195 cw(c4717.85,3152.75) 4747.72,3182.63 ccw(c4717.85,3152.75) v1@4717.85,3195 ; v1@4717.85,3195 ccw(c4717.85,3237.25) 4747.72,3207.37 cw(c4717.85,3237.25) v1@4717.85,3195 ; 4722.32,3195 cw(c4722.32,3213.11) 4709.52,3200.3 ccw(c4722.32,3213.11) 4722.32,3195 ; 4722.32,3195 ccw(c4722.32,3176.89) 4709.52,3189.7 cw(c4722.32,3176.89) 4722.32,3195 ; v1@4521.52,2518.7 cw(c4534,2506.22) 4534,2523.87 ccw(c4534,2506.22) v1@4521.52,2518.7 ; v1@4521.52,2529.3 ccw(c4534.64,2542.43) 4534.64,2523.87 cw(c4534.64,2542.43) v1@4521.52,2529.3
  Bottom Layer w15: v1(4516.21,2524) 4667.21,2524 4704.21,2561 v1(4704.21,3195) ; 4534.32,2524 cw(c4534.32,2542.11) 4521.52,2529.3 ccw(c4534.32,2542.11) 4534.32,2524 ; 4534.32,2524 ccw(c4534.32,2505.89) 4521.52,2518.7 cw(c4534.32,2505.89) 4534.32,2524 ; 4704.21,3176.89 cw(c4722.32,3176.89) 4709.52,3189.7 ccw(c4722.32,3176.89) 4704.21,3176.89 ; 4704.21,3176.89 ccw(c4686.11,3176.89) 4698.91,3189.7 cw(c4686.11,3176.89) 4704.21,3176.89
NetM1_21: M1.21 R52.1 | length 464.5
  Top Layer w15: M1.21@4761.98,1931.35 4761.98,1809.23 4773.21,1798 4835.21,1798 4844.21,1789 R52.1@4844.21,1725 ; 4761.98,1881.33 cw(c4779.52,1881.33) 4767.12,1893.73 ccw(c4779.52,1881.33) 4761.98,1881.33 ; 4761.98,1881.33 ccw(c4744.45,1881.33) 4756.85,1893.73 cw(c4744.45,1881.33) 4761.98,1881.33 ; 4844.21,1769.75 cw(c4801.96,1769.75) 4831.84,1739.87 ccw(c4801.96,1769.75) 4844.21,1769.75 ; 4844.21,1769.75 ccw(c4886.46,1769.75) 4856.59,1739.87 cw(c4886.46,1769.75) 4844.21,1769.75
NetM1_22: M1.22 R51.1 R54.2 | length 847.5
  Top Layer w15: M1.22@4805.29,1931.35 4805.29,1835.92 4815.21,1826 4915.21,1826 4924.21,1817 R54.2@4924.21,1725 R51.1@5004.21,1725 ; 4805.29,1881.33 cw(c4822.83,1881.33) 4810.43,1893.73 ccw(c4822.83,1881.33) 4805.29,1881.33 ; 4805.29,1881.33 ccw(c4787.75,1881.33) 4800.16,1893.73 cw(c4787.75,1881.33) 4805.29,1881.33 ; 4924.21,1769.75 cw(c4881.96,1769.75) 4911.84,1739.87 ccw(c4881.96,1769.75) 4924.21,1769.75 ; 4924.21,1769.75 ccw(c4966.46,1769.75) 4936.59,1739.87 cw(c4966.46,1769.75) 4924.21,1769.75 ; 4961.96,1725 cw(c4961.96,1682.75) 4991.84,1712.63 ccw(c4961.96,1682.75) 4961.96,1725 ; 4961.96,1725 ccw(c4961.96,1767.25) 4991.84,1737.37 cw(c4961.96,1767.25) 4961.96,1725 ; 4966.46,1725 cw(c4966.46,1767.25) 4936.59,1737.37 ccw(c4966.46,1767.25) 4966.46,1725 ; 4966.46,1725 ccw(c4966.46,1682.75) 4936.59,1712.63 cw(c4966.46,1682.75) 4966.46,1725
NetM1_24: M1.24 R50.1 | length 573.4
  Top Layer w15: M1.24@4891.91,1931.35 4891.91,1858.31 4899.91,1850.31 5069.91,1850.31 5084.21,1836 R50.1@5084.21,1725 ; 4891.91,1881.33 cw(c4909.44,1881.33) 4897.04,1893.73 ccw(c4909.44,1881.33) 4891.91,1881.33 ; 4891.91,1881.33 ccw(c4874.37,1881.33) 4886.77,1893.73 cw(c4874.37,1881.33) 4891.91,1881.33 ; 5084.21,1769.75 cw(c5041.96,1769.75) 5071.84,1739.87 ccw(c5041.96,1769.75) 5084.21,1769.75 ; 5084.21,1769.75 ccw(c5126.46,1769.75) 5096.59,1739.87 cw(c5126.46,1769.75) 5084.21,1769.75
NetM1_28: M1.28 R48.1 | length 414.7
  Top Layer w15: R48.1@5169.21,1725 5169.21,1774 5218.68,1823.46 M1.28@5218.68,1931.35 ; 5169.21,1769.75 cw(c5126.96,1769.75) 5156.84,1739.87 ccw(c5126.96,1769.75) 5169.21,1769.75 ; 5169.21,1769.75 ccw(c5211.46,1769.75) 5181.59,1739.87 cw(c5211.46,1769.75) 5169.21,1769.75 ; 5218.68,1881.33 cw(c5236.21,1881.33) 5223.81,1893.73 ccw(c5236.21,1881.33) 5218.68,1881.33 ; 5218.68,1881.33 ccw(c5201.14,1881.33) 5213.54,1893.73 cw(c5201.14,1881.33) 5218.68,1881.33
NetM1_29: M1.29 R45.1 | length 399.5
  Top Layer w15: R45.1@5249.21,1725 5249.21,1809 5261.98,1821.77 M1.29@5261.98,1931.35 ; 5249.21,1769.75 cw(c5206.96,1769.75) 5236.84,1739.87 ccw(c5206.96,1769.75) 5249.21,1769.75 ; 5249.21,1769.75 ccw(c5291.46,1769.75) 5261.59,1739.87 cw(c5291.46,1769.75) 5249.21,1769.75 ; 5261.98,1881.33 cw(c5279.52,1881.33) 5267.12,1893.73 ccw(c5279.52,1881.33) 5261.98,1881.33 ; 5261.98,1881.33 ccw(c5244.45,1881.33) 5256.85,1893.73 cw(c5244.45,1881.33) 5261.98,1881.33
NetM1_30: M1.30 R42.1 | length 404.1
  Top Layer w15: M1.30@5305.29,1931.35 5305.29,1833.92 5329.21,1810 R42.1@5329.21,1725 ; 5305.29,1881.33 cw(c5322.83,1881.33) 5310.43,1893.73 ccw(c5322.83,1881.33) 5305.29,1881.33 ; 5305.29,1881.33 ccw(c5287.75,1881.33) 5300.16,1893.73 cw(c5287.75,1881.33) 5305.29,1881.33 ; 5329.21,1769.75 cw(c5286.96,1769.75) 5316.84,1739.87 ccw(c5286.96,1769.75) 5329.21,1769.75 ; 5329.21,1769.75 ccw(c5371.46,1769.75) 5341.59,1739.87 cw(c5371.46,1769.75) 5329.21,1769.75
NetPTC2_1: PTC2.1 U3.6 | length 311.1
  Top Layer w30: PTC2.1@3070.21,860 U3.6@3070.21,1019.41 ; 3070.21,908.28 cw(c3021.93,908.28) 3056.07,874.14 ccw(c3021.93,908.28) 3070.21,908.28 ; 3070.21,908.28 ccw(c3118.5,908.28) 3084.35,874.14 cw(c3118.5,908.28) 3070.21,908.28
NetPTC3_1: PTC3.1 U6.6 | length 311.1
  Top Layer w30: PTC3.1@3500.21,860 U6.6@3500.21,1019.41 ; 3500.21,908.28 cw(c3451.93,908.28) 3486.07,874.14 ccw(c3451.93,908.28) 3500.21,908.28 ; 3500.21,908.28 ccw(c3548.5,908.28) 3514.35,874.14 cw(c3548.5,908.28) 3500.21,908.28
NetQ1_1: Q1.1 U2.6 | length 1404.2
  Top Layer w15: v1(829.42,2571.8) U2.6@873.21,2571.8 ; 847.52,2571.8 cw(c847.52,2589.9) 834.72,2577.1 ccw(c847.52,2589.9) 847.52,2571.8 ; 847.52,2571.8 ccw(c847.52,2553.69) 834.72,2566.49 cw(c847.52,2553.69) 847.52,2571.8
  Top Layer w20: Q1.1@468.31,1855.61 v2(562.21,1855.61) ; 517.11,1855.61 cw(c517.11,1883.75) 497.22,1863.85 ccw(c517.11,1883.75) 517.11,1855.61 ; 517.11,1855.61 ccw(c517.11,1827.48) 497.22,1847.37 cw(c517.11,1827.48) 517.11,1855.61 ; 538.07,1855.61 cw(c538.07,1831.47) 555.14,1848.54 ccw(c538.07,1831.47) 538.07,1855.61 ; 538.07,1855.61 ccw(c538.07,1879.76) 555.14,1862.69 cw(c538.07,1879.76) 538.07,1855.61
  Bottom Layer w20: v2(562.21,1855.61) 805.83,1855.61 829.42,1879.2 v1(829.42,2571.8) ; 586.35,1855.61 cw(c586.35,1879.76) 569.28,1862.69 ccw(c586.35,1879.76) 586.35,1855.61 ; 586.35,1855.61 ccw(c586.35,1831.47) 569.28,1848.54 cw(c586.35,1831.47) 586.35,1855.61
NetQ2_1: Q2.1 R62.2 | length 2672.7
  Top Layer w15: v1(1564.21,3340) Q2.1@1599.21,3340 ; R62.2@3369.21,3455 v1(3369.21,3600) ; v1@1573.86,3340 cw(c1573.86,3314.65) 1591.79,3332.58 ccw(c1573.86,3314.65) v1@1573.86,3340 ; v1@1573.86,3340 ccw(c1573.86,3365.35) 1591.79,3347.42 cw(c1573.86,3365.35) v1@1573.86,3340 ; Q2.1@1582.32,3340 cw(c1582.32,3358.11) 1569.52,3345.3 ccw(c1582.32,3358.11) Q2.1@1582.32,3340 ; Q2.1@1582.32,3340 ccw(c1582.32,3321.89) 1569.52,3334.7 cw(c1582.32,3321.89) Q2.1@1582.32,3340 ; 3369.21,3499.75 cw(c3326.96,3499.75) 3356.84,3469.87 ccw(c3326.96,3499.75) 3369.21,3499.75 ; 3369.21,3499.75 ccw(c3411.46,3499.75) 3381.59,3469.87 cw(c3411.46,3499.75) 3369.21,3499.75 ; 3369.21,3581.89 cw(c3387.32,3581.89) 3374.52,3594.7 ccw(c3387.32,3581.89) 3369.21,3581.89 ; 3369.21,3581.89 ccw(c3351.11,3581.89) 3363.91,3594.7 cw(c3351.11,3581.89) 3369.21,3581.89
  Bottom Layer w15: v1(1564.21,3340) 1564.21,3579.21 1585,3600 v1(3369.21,3600) ; 1564.21,3358.11 cw(c1546.11,3358.11) 1558.91,3345.3 ccw(c1546.11,3358.11) 1564.21,3358.11 ; 1564.21,3358.11 ccw(c1582.32,3358.11) 1569.52,3345.3 cw(c1582.32,3358.11) 1564.21,3358.11 ; 3351.11,3600 cw(c3351.11,3581.89) 3363.91,3594.7 ccw(c3351.11,3581.89) 3351.11,3600 ; 3351.11,3600 ccw(c3351.11,3618.11) 3363.91,3605.3 cw(c3351.11,3618.11) 3351.11,3600
NetQ2_3: Q2.3 SM1.12 | length 2216
  Top Layer w15: Q2.3@1637.21,3420 1637.21,3552.21 1660,3575 2109,3575 2129.21,3595.21 2129.21,4069.21 2160,4100 2875,4100 2899.6,4124.6 SM1.12@2899.6,4181 ; 1637.21,3452.35 cw(c1611.86,3452.35) 1629.79,3434.42 ccw(c1611.86,3452.35) 1637.21,3452.35 ; 1637.21,3452.35 ccw(c1662.56,3452.35) 1644.64,3434.42 cw(c1662.56,3452.35) 1637.21,3452.35 ; 2899.6,4126.68 cw(c2953.92,4126.68) 2915.51,4165.09 ccw(c2953.92,4126.68) 2899.6,4126.68 ; 2899.6,4126.68 ccw(c2845.28,4126.68) 2883.69,4165.09 cw(c2845.28,4126.68) 2899.6,4126.68
NetQ3_1: Q3.1 R63.2 | length 2334.8
  Top Layer w15: v1(1734.21,3340) Q3.1@1769.21,3340 ; R63.2@3274.21,3455 v1(3274.21,3565) ; v1@1743.86,3340 cw(c1743.86,3314.65) 1761.79,3332.58 ccw(c1743.86,3314.65) v1@1743.86,3340 ; v1@1743.86,3340 ccw(c1743.86,3365.35) 1761.79,3347.42 cw(c1743.86,3365.35) v1@1743.86,3340 ; Q3.1@1752.32,3340 cw(c1752.32,3358.11) 1739.52,3345.3 ccw(c1752.32,3358.11) Q3.1@1752.32,3340 ; Q3.1@1752.32,3340 ccw(c1752.32,3321.89) 1739.52,3334.7 cw(c1752.32,3321.89) Q3.1@1752.32,3340 ; 3274.21,3499.75 cw(c3231.96,3499.75) 3261.84,3469.87 ccw(c3231.96,3499.75) 3274.21,3499.75 ; 3274.21,3499.75 ccw(c3316.46,3499.75) 3286.59,3469.87 cw(c3316.46,3499.75) 3274.21,3499.75 ; 3274.21,3546.89 cw(c3292.32,3546.89) 3279.52,3559.7 ccw(c3292.32,3546.89) 3274.21,3546.89 ; 3274.21,3546.89 ccw(c3256.11,3546.89) 3268.91,3559.7 cw(c3256.11,3546.89) 3274.21,3546.89
  Bottom Layer w15: v1(1734.21,3340) 1734.21,3539.21 1760,3565 v1(3274.21,3565) ; 1734.21,3358.11 cw(c1716.11,3358.11) 1728.91,3345.3 ccw(c1716.11,3358.11) 1734.21,3358.11 ; 1734.21,3358.11 ccw(c1752.32,3358.11) 1739.52,3345.3 cw(c1752.32,3358.11) 1734.21,3358.11 ; 3256.11,3565 cw(c3256.11,3546.89) 3268.91,3559.7 ccw(c3256.11,3546.89) 3256.11,3565 ; 3256.11,3565 ccw(c3256.11,3583.11) 3268.91,3570.3 cw(c3256.11,3583.11) 3256.11,3565
NetQ3_3: Q3.3 SM1.9 | length 2345.5
  Top Layer w15: Q3.3@1807.21,3420 1807.21,3521.21 1831,3545 2144,3545 2164.21,3565.21 2164.21,4039.21 2195,4070 3175,4070 3199.6,4094.6 SM1.9@3199.6,4181 ; 1807.21,3452.35 cw(c1781.86,3452.35) 1799.79,3434.42 ccw(c1781.86,3452.35) 1807.21,3452.35 ; 1807.21,3452.35 ccw(c1832.56,3452.35) 1814.64,3434.42 cw(c1832.56,3452.35) 1807.21,3452.35 ; 3199.6,4126.68 cw(c3253.92,4126.68) 3215.51,4165.09 ccw(c3253.92,4126.68) 3199.6,4126.68 ; 3199.6,4126.68 ccw(c3145.28,4126.68) 3183.69,4165.09 cw(c3145.28,4126.68) 3199.6,4126.68
NetQ4_1: Q4.1 R69.2 | length 2001
  Top Layer w15: v1(1904.21,3340) Q4.1@1939.21,3340 ; R69.2@3179.21,3455 v1(3179.21,3530) ; v1@1913.86,3340 cw(c1913.86,3314.65) 1931.79,3332.58 ccw(c1913.86,3314.65) v1@1913.86,3340 ; v1@1913.86,3340 ccw(c1913.86,3365.35) 1931.79,3347.42 cw(c1913.86,3365.35) v1@1913.86,3340 ; Q4.1@1922.32,3340 cw(c1922.32,3358.11) 1909.52,3345.3 ccw(c1922.32,3358.11) Q4.1@1922.32,3340 ; Q4.1@1922.32,3340 ccw(c1922.32,3321.89) 1909.52,3334.7 cw(c1922.32,3321.89) Q4.1@1922.32,3340 ; 3179.21,3499.75 cw(c3136.96,3499.75) 3166.84,3469.87 ccw(c3136.96,3499.75) 3179.21,3499.75 ; 3179.21,3499.75 ccw(c3221.46,3499.75) 3191.59,3469.87 cw(c3221.46,3499.75) 3179.21,3499.75 ; 3179.21,3511.89 cw(c3197.32,3511.89) 3184.52,3524.7 ccw(c3197.32,3511.89) 3179.21,3511.89 ; 3179.21,3511.89 ccw(c3161.11,3511.89) 3173.91,3524.7 cw(c3161.11,3511.89) 3179.21,3511.89
  Bottom Layer w15: v1(1904.21,3340) 1904.21,3506.21 1928,3530 v1(3179.21,3530) ; 1904.21,3358.11 cw(c1886.11,3358.11) 1898.91,3345.3 ccw(c1886.11,3358.11) 1904.21,3358.11 ; 1904.21,3358.11 ccw(c1922.32,3358.11) 1909.52,3345.3 cw(c1922.32,3358.11) 1904.21,3358.11 ; 3161.11,3530 cw(c3161.11,3511.89) 3173.91,3524.7 ccw(c3161.11,3511.89) 3161.11,3530 ; 3161.11,3530 ccw(c3161.11,3548.11) 3173.91,3535.3 cw(c3161.11,3548.11) 3161.11,3530
NetQ4_3: Q4.3 SM1.8 | length 2274.9
  Top Layer w15: Q4.3@1977.21,3420 1977.21,3490.21 2002,3515 2179,3515 2199.21,3535.21 2199.21,4009.21 2230,4040 3275,4040 3299.6,4064.6 SM1.8@3299.6,4181 ; 1977.21,3452.35 cw(c1951.86,3452.35) 1969.79,3434.42 ccw(c1951.86,3452.35) 1977.21,3452.35 ; 1977.21,3452.35 ccw(c2002.56,3452.35) 1984.64,3434.42 cw(c2002.56,3452.35) 1977.21,3452.35 ; 3299.6,4126.68 cw(c3353.92,4126.68) 3315.51,4165.09 ccw(c3353.92,4126.68) 3299.6,4126.68 ; 3299.6,4126.68 ccw(c3245.28,4126.68) 3283.69,4165.09 cw(c3245.28,4126.68) 3299.6,4126.68
NetQ5_1: Q5.1 R74.2 | length 1643
  Top Layer w15: v1(2074.21,3340) Q5.1@2109.21,3340 ; R74.2@3084.21,3455 v1(3084.21,3495) ; v1@2083.86,3340 cw(c2083.86,3314.65) 2101.79,3332.58 ccw(c2083.86,3314.65) v1@2083.86,3340 ; v1@2083.86,3340 ccw(c2083.86,3365.35) 2101.79,3347.42 cw(c2083.86,3365.35) v1@2083.86,3340 ; Q5.1@2092.32,3340 cw(c2092.32,3358.11) 2079.52,3345.3 ccw(c2092.32,3358.11) Q5.1@2092.32,3340 ; Q5.1@2092.32,3340 ccw(c2092.32,3321.89) 2079.52,3334.7 cw(c2092.32,3321.89) Q5.1@2092.32,3340 ; R74.2@3084.21,3476.89 cw(c3102.32,3476.89) 3089.52,3489.7 ccw(c3102.32,3476.89) R74.2@3084.21,3476.89 ; R74.2@3084.21,3476.89 ccw(c3066.11,3476.89) 3078.91,3489.7 cw(c3066.11,3476.89) R74.2@3084.21,3476.89 ; v1(3084.21,3495) cw(c3052.79,3495) 3072.97,3470.91 ccw(c3052.79,3495) v1(3084.21,3495) ; v1(3084.21,3495) ccw(c3115.64,3495) 3095.45,3470.91 cw(c3115.64,3495) v1(3084.21,3495)
  Bottom Layer w15: v1(2074.21,3340) 2074.21,3471.21 2098,3495 v1(3084.21,3495) ; 2074.21,3358.11 cw(c2056.11,3358.11) 2068.91,3345.3 ccw(c2056.11,3358.11) 2074.21,3358.11 ; 2074.21,3358.11 ccw(c2092.32,3358.11) 2079.52,3345.3 cw(c2092.32,3358.11) 2074.21,3358.11 ; 3066.11,3495 cw(c3066.11,3476.89) 3078.91,3489.7 ccw(c3066.11,3476.89) 3066.11,3495 ; 3066.11,3495 ccw(c3066.11,3513.11) 3078.91,3500.3 cw(c3066.11,3513.11) 3066.11,3495
NetQ5_3: Q5.3 SM1.6 | length 2054.5
  Top Layer w15: Q5.3@2147.21,3420 2147.21,3466.21 2166,3485 2221,3485 2239.21,3503.21 v1(2239.21,3635) ; v1(3399.6,3635) SM1.6@3399.6,3781 ; 2147.21,3452.35 cw(c2121.86,3452.35) 2139.79,3434.42 ccw(c2121.86,3452.35) 2147.21,3452.35 ; 2147.21,3452.35 ccw(c2172.56,3452.35) 2154.64,3434.42 cw(c2172.56,3452.35) 2147.21,3452.35 ; 2239.21,3616.89 cw(c2257.32,3616.89) 2244.52,3629.7 ccw(c2257.32,3616.89) 2239.21,3616.89 ; 2239.21,3616.89 ccw(c2221.11,3616.89) 2233.91,3629.7 cw(c2221.11,3616.89) 2239.21,3616.89 ; 3399.6,3653.11 cw(c3381.49,3653.11) 3394.3,3640.3 ccw(c3381.49,3653.11) 3399.6,3653.11 ; 3399.6,3653.11 ccw(c3417.7,3653.11) 3404.9,3640.3 cw(c3417.7,3653.11) 3399.6,3653.11 ; 3399.6,3726.68 cw(c3453.92,3726.68) 3415.51,3765.09 ccw(c3453.92,3726.68) 3399.6,3726.68 ; 3399.6,3726.68 ccw(c3345.28,3726.68) 3383.69,3765.09 cw(c3345.28,3726.68) 3399.6,3726.68
  Bottom Layer w15: 2254.21,3635 v1(3399.6,3635) ; 2257.32,3635 cw(c2257.32,3653.11) 2244.52,3640.3 ccw(c2257.32,3653.11) 2257.32,3635 ; 2257.32,3635 ccw(c2257.32,3616.89) 2244.52,3629.7 cw(c2257.32,3616.89) 2257.32,3635 ; 3381.49,3635 cw(c3381.49,3616.89) 3394.3,3629.7 ccw(c3381.49,3616.89) 3381.49,3635 ; 3381.49,3635 ccw(c3381.49,3653.11) 3394.3,3640.3 cw(c3381.49,3653.11) 3381.49,3635
NetR3_1: R3.1 U2.1 | length 522.8
  Top Layer w15: R3.1@1024.21,2276.61 1115.83,2276.61 1126.21,2287 1126.21,2509 1114.6,2520.61 U2.1@1069.21,2520.61 ; 1068.96,2276.61 cw(c1068.96,2318.86) 1039.09,2288.99 ccw(c1068.96,2318.86) 1068.96,2276.61 ; 1068.96,2276.61 ccw(c1068.96,2234.37) 1039.09,2264.24 cw(c1068.96,2234.37) 1068.96,2276.61
NetR4_1: R4.1 R6.2 U2.3 | length 723.3
  Top Layer w15: R4.1@1019.21,2750.61 R6.2@1019.21,2670.61 1109.6,2670.61 1124.21,2656 1124.21,2580.61 1115.39,2571.8 U2.3@1069.21,2571.8 ; 1019.21,2708.37 cw(c1061.46,2708.37) 1031.59,2738.24 ccw(c1061.46,2708.37) 1019.21,2708.37 ; 1019.21,2708.37 ccw(c976.96,2708.37) 1006.84,2738.24 cw(c976.96,2708.37) 1019.21,2708.37 ; 1019.21,2712.86 cw(c976.96,2712.86) 1006.84,2682.99 ccw(c976.96,2712.86) 1019.21,2712.86 ; 1019.21,2712.86 ccw(c1061.46,2712.86) 1031.59,2682.99 cw(c1061.46,2712.86) 1019.21,2712.86 ; 1063.96,2670.61 cw(c1063.96,2712.86) 1034.09,2682.99 ccw(c1063.96,2712.86) 1063.96,2670.61 ; 1063.96,2670.61 ccw(c1063.96,2628.37) 1034.09,2658.24 cw(c1063.96,2628.37) 1063.96,2670.61
NetR7_2: R7.2 U2.7 | length 833.4
  Top Layer w15: v1@871.83,2358.61 R7.2@929.21,2358.61 ; U2.7@873.21,2546.2 930.42,2546.2 941.21,2557 v1(985.21,2557) ; v1@884.46,2358.61 cw(c884.46,2316.37) 914.34,2346.24 ccw(c884.46,2316.37) v1@884.46,2358.61 ; v1@884.46,2358.61 ccw(c884.46,2400.86) 914.34,2370.99 cw(c884.46,2400.86) v1@884.46,2358.61 ; 892.93,2358.61 cw(c892.93,2376.72) 880.13,2363.92 ccw(c892.93,2376.72) 892.93,2358.61 ; 892.93,2358.61 ccw(c892.93,2340.51) 880.13,2353.31 cw(c892.93,2340.51) 892.93,2358.61 ; 967.11,2557 cw(c967.11,2538.89) 979.91,2551.7 ccw(c967.11,2538.89) 967.11,2557 ; 967.11,2557 ccw(c967.11,2575.11) 979.91,2562.3 cw(c967.11,2575.11) 967.11,2557
  Bottom Layer w15: v1@871.83,2358.61 963.83,2358.61 985.21,2380 v1(985.21,2557) ; 892.93,2358.61 cw(c892.93,2376.72) 880.13,2363.92 ccw(c892.93,2376.72) 892.93,2358.61 ; 892.93,2358.61 ccw(c892.93,2340.51) 880.13,2353.31 cw(c892.93,2340.51) 892.93,2358.61 ; 985.21,2538.89 cw(c1003.32,2538.89) 990.52,2551.7 ccw(c1003.32,2538.89) 985.21,2538.89 ; 985.21,2538.89 ccw(c967.11,2538.89) 979.91,2551.7 cw(c967.11,2538.89) 985.21,2538.89
  other v1: 874.83,2358.61